# Altium PCB LC4_REV3.PcbDoc (part 2 of 2)
Units mm, origin at the board's own origin, x right, y up, seen from the top; angles counter-clockwise.
Board outline 41.25 x 70 mm, 4 copper layers (Layer 1, Layer 2, Layer 3, Layer 4), stack 1.942 mm thick; 162 components, 362 nets, 610 pads, 239 vias.
Unrouted connection lines stored in the file: 28.
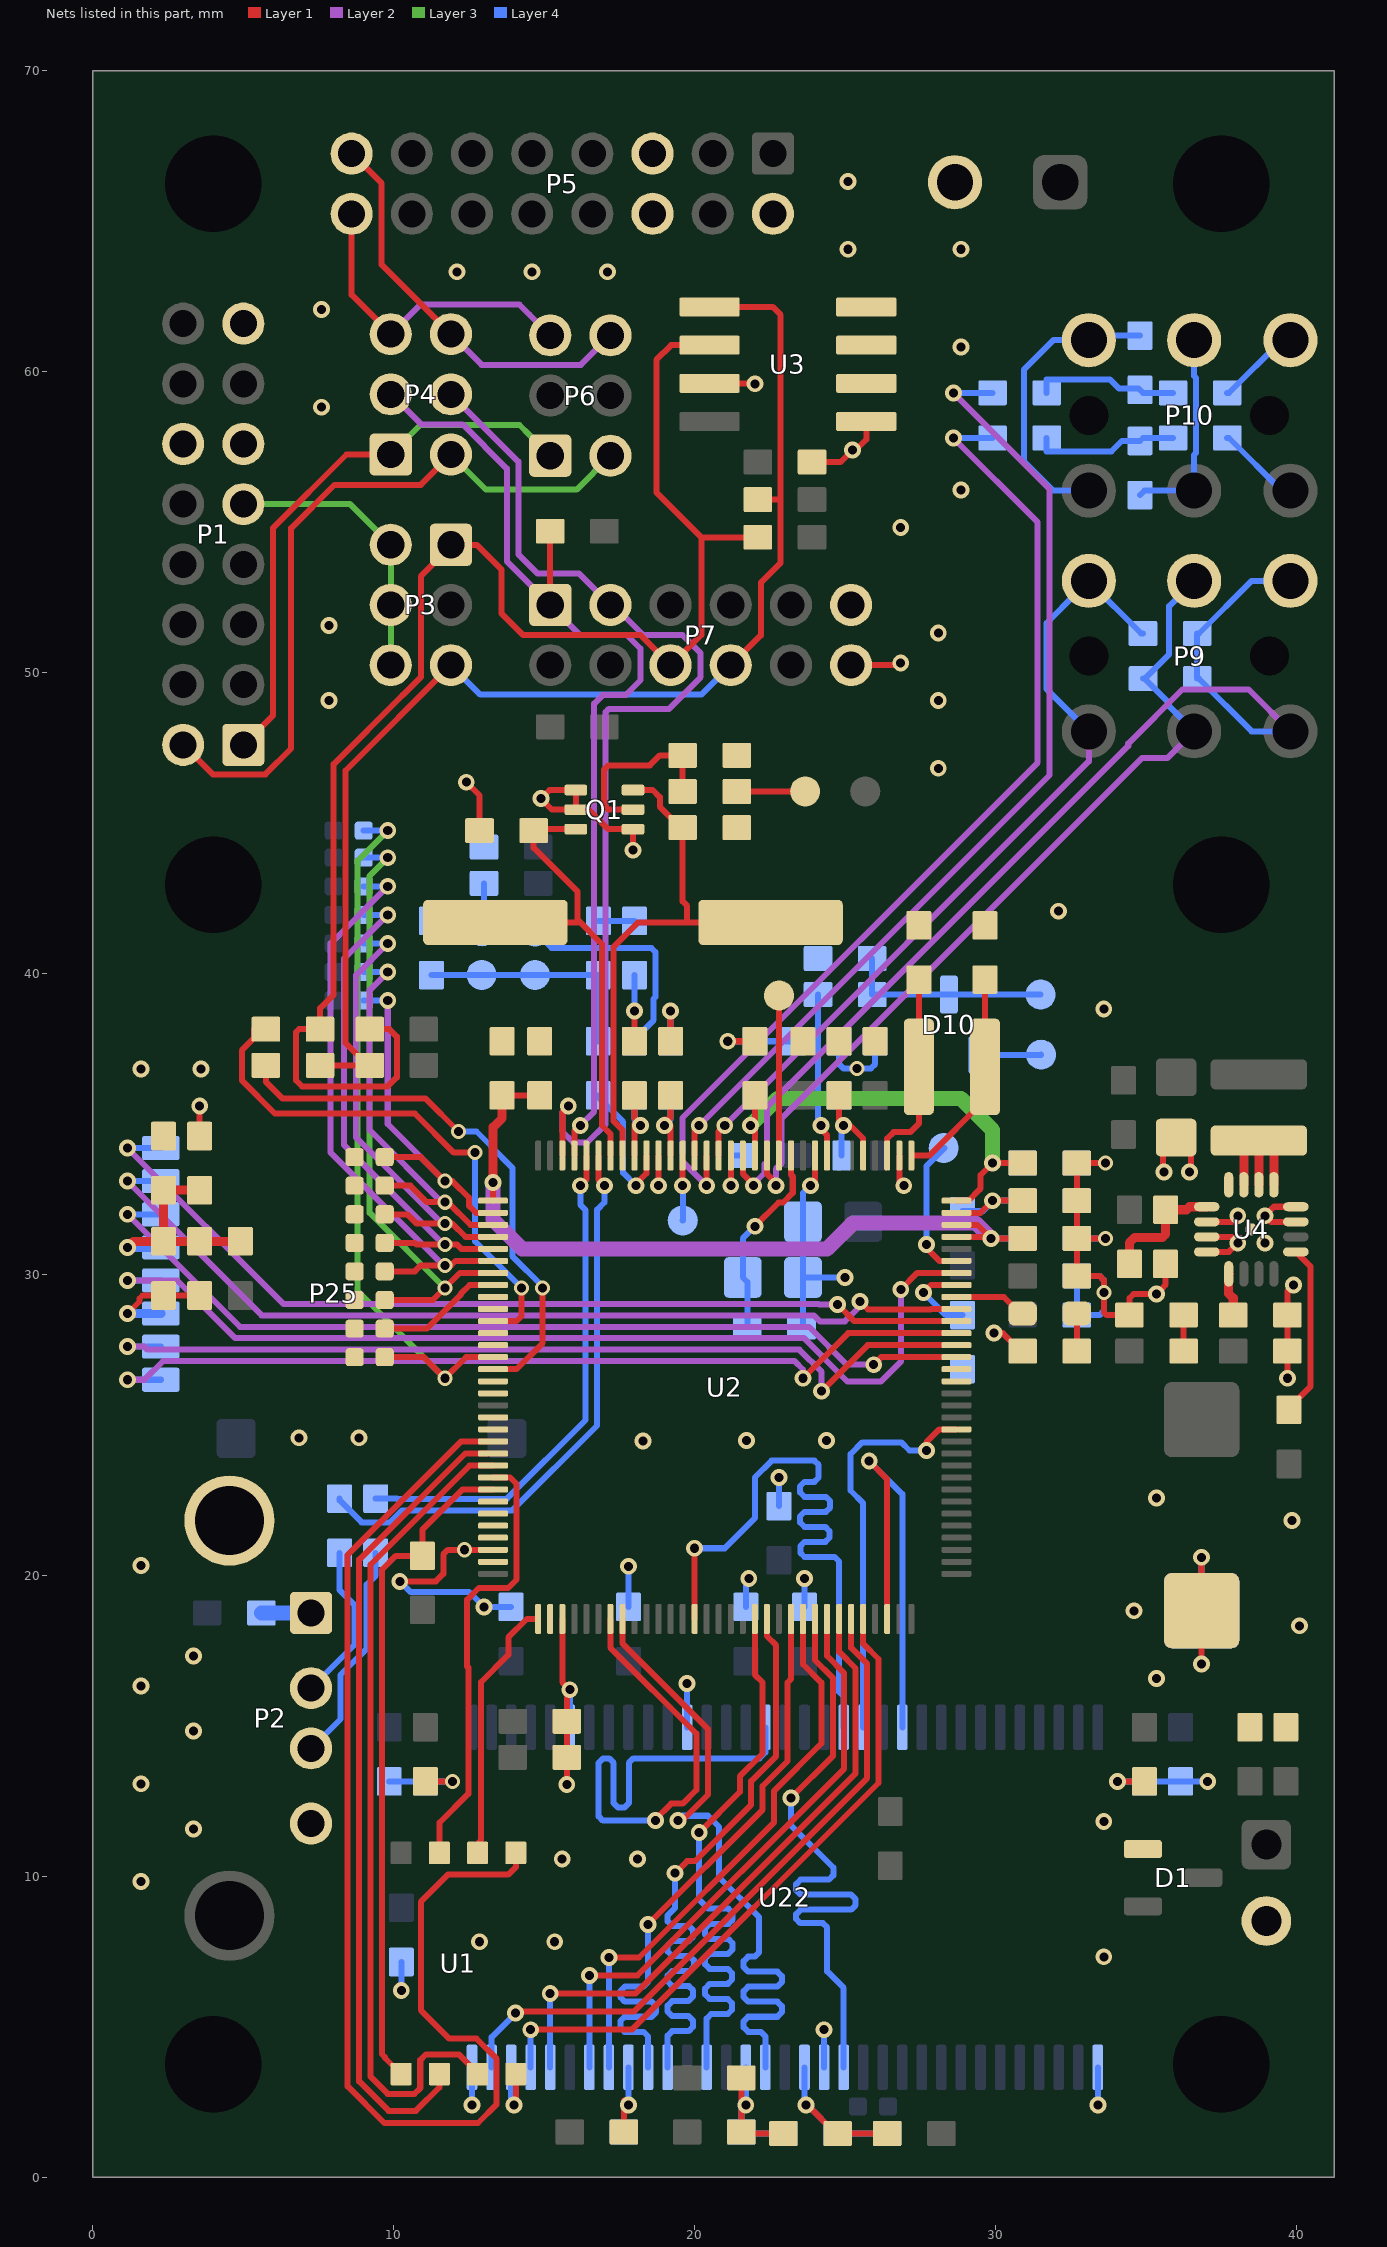
[diagram p4: the nets of this part, all layers, seen from the top]

## Via types
v1: diameter 0.56, hole 0.3, Layer 1 to Layer 4, 218 vias
v2: diameter 0.5, hole 0.3, Layer 1 to Layer 4, 21 vias

## Nets (pads, with @x,y where several pads share a name; then routed paths per layer and width w, separated by ;. In a path a pad name is that pad's centre, name@x,y a point inside that pad or via, vN(x,y) a via of type N, cw(c..) or ccw(c..) an arc to the next point about the centre after c; other vN are vias at no path point) (continued)
D_IMX[8]: U2.51 U22.54 | length 21.8
  Layer 1 w0.2: v1(20.15,11.45) 21.5,12.8 21.5,13.32 22.26,14.08 22.26,16.44 22,16.7 22,17.77 U2.51@22,18.55
  Layer 4 w0.2: v1(20.15,11.45) 20.15,9.22 20.45,8.92 21.12,8.92 21.26,8.78 21.26,8.56 21.12,8.42 20.5,8.42 20.35,8.27 20.35,8.07 20.5,7.92 21.11,7.92 21.25,7.78 21.25,7.56 21.11,7.42 20.5,7.42 20.35,7.27 20.35,7.07 20.5,6.92 21.1,6.92 21.24,6.78 21.24,6.56 21.1,6.42 20.5,6.42 20.35,6.27 20.35,6.07 20.5,5.92 21.1,5.92 21.24,5.78 21.24,5.56 21.1,5.42 20.55,5.42 20.4,5.27 20.4,4.888 U22.54@20.4,3.65
D_IMX[9]: U2.52 U22.56 | length 22.1
  Layer 1 w0.2: v1(19.35,10.1) 19.75,10.5 20.01,10.5 21.88,12.37 21.88,13.16 22.71,13.99 22.71,17.673 22.4,17.983 U2.52@22.4,18.55
  Layer 4 w0.2: U22.56@19.1,3.65 19.1,4.315 19.1,4.7 19.25,4.85 19.8,4.85 19.94,4.99 19.94,5.21 19.8,5.35 19.25,5.35 19.1,5.5 19.1,5.7 19.25,5.85 19.79,5.85 19.95,6.01 19.95,6.21 19.81,6.35 19.25,6.35 19.1,6.5 19.1,6.7 19.25,6.85 19.83,6.85 19.97,6.99 19.97,7.21 19.83,7.35 19.25,7.35 19.1,7.5 19.1,7.7 19.25,7.85 19.81,7.85 19.95,7.99 19.95,8.21 19.81,8.35 19.25,8.35 19.1,8.5 19.1,8.7 19.25,8.85 19.35,8.95 v1(19.35,10.1)
D_IMX[10]: U2.54 U22.57 | length 20.4
  Layer 1 w0.2: v1(18.45,8.4) 22.26,12.21 22.26,13 23.09,13.83 23.09,16.44 23.2,16.55 U2.54@23.2,18.55
  Layer 4 w0.2: U22.57@18.45,3.65 18.45,4.099 18.45,4.68 18.3,4.83 17.67,4.83 17.53,4.97 17.53,5.19 17.67,5.33 18.57,5.33 18.72,5.48 18.72,5.68 18.57,5.83 17.68,5.83 17.54,5.97 17.54,6.19 17.68,6.33 18.3,6.33 18.45,6.48 18.45,7.238 v1(18.45,8.4)
D_IMX[11]: U2.55 U22.59 | length 18.7
  Layer 1 w0.2: v1(17.15,7.3) 18.15,7.3 22.64,11.79 22.64,12.84 24.21,14.41 24.21,16.433 23.6,17.043 23.6,17.77 U2.55@23.6,18.55
  Layer 4 w0.2: U22.59@17.15,3.65 v1(17.15,7.3)
D_IMX[12]: U2.57 U22.60 | length 19.6
  Layer 1 w0.2: v1(16.5,6.7) 18.092,6.7 24.97,13.578 24.97,16.748 24.4,17.318 24.4,17.77 U2.57@24.4,18.55
  Layer 4 w0.2: U22.60@16.5,3.65 v1(16.5,6.7)
D_IMX[13]: U2.58 U22.62 | length 21
  Layer 1 w0.2: v1(15.2,6.1) 18.03,6.1 25.35,13.42 25.35,16.905 24.8,17.455 24.8,17.77 U2.58@24.8,18.55
  Layer 4 w0.2: U22.62@15.2,3.65 v1(15.2,6.1)
D_IMX[14]: U2.60 U22.63 | length 21.9
  Layer 1 w0.2: v1(14.55,4.9) 17.91,4.9 26.11,13.1 26.11,17.22 25.6,17.73 25.6,17.77 U2.60@25.6,18.55
  Layer 4 w0.2: U22.63@14.55,3.65 v1(14.55,4.9)
D_IMX[15]: U2.59 U22.65 | length 22.6
  Layer 1 w0.2: v1(14.05,5.45) 14.1,5.5 17.97,5.5 25.73,13.26 25.73,17.063 25.2,17.593 25.2,17.77 U2.59@25.2,18.55
  Layer 4 w0.2: U22.65@13.25,3.65 13.25,4.65 v1(14.05,5.45)
D_RXD: P4.3 P7.1 R15.1 U2.125 | length 34.3
  Layer 1 w0.2: P7.1@15.2,52.25 R15.1@15.2,54.7 ; U2.125@16,33.95 16,34.79 16.16,34.95 v1(16.2,34.95)
  Layer 2 w0.2: P4.3@9.9,59.25 9.91,59.25 10.91,58.25 12.29,58.25 13.76,56.78 13.76,53.7 15.2,52.26 P7.1@15.2,52.25 16.2,51.25 17.75,51.25 18.2,50.8 18.2,49.75 17.7,49.25 16.943,49.25 16.66,48.967 16.66,35.41 v1(16.2,34.95)
D_TXD: P4.4 P7.3 U2.126 | length 36.3
  Layer 1 w0.2: U2.126@15.6,33.95 15.6,35.4 v1(15.8,35.6)
  Layer 2 w0.2: P4.4@11.9,59.25 14.14,57.01 14.14,53.93 14.78,53.29 16.16,53.29 P7.3@17.2,52.25 17.3,52.25 18.3,51.25 19.6,51.25 20.2,50.65 20.2,49.85 19.15,48.8 17.15,48.8 17.04,48.69 17.04,34.99 16.44,34.39 15.96,34.39 15.6,34.75 15.6,35.4 v1(15.8,35.6)
DAC[0]: 
DAC[1]: 
DAC[2]: 
DAC[3]: 
DAC[4]: 
DAC[5]: 
DAC[6]: 
DAC[7]: 
DAC[8]: 
DAC[9]: 
DBG_RX: P4.6 P5.15 P6.6 | length 14.3
  Layer 1 w0.2: P5.15@8.6,67.25 8.61,67.25 9.6,66.26 9.6,63.56 11.31,61.85 ; 11.31,61.85 11.31,61.84 P4.6@11.9,61.25 11.9,61.26 11.31,61.85
  Layer 2 w0.2: P4.6@11.9,61.25 12.92,60.23 16.22,60.23 P6.6@17.2,61.21
DBG_TX: P4.5 P5.16 P6.5 | length 10.7
  Layer 1 w0.2: P5.16@8.6,65.25 8.6,62.56 9.9,61.26 P4.5@9.9,61.25
  Layer 2 w0.2: P4.5@9.9,61.25 10.88,62.23 14.178,62.23 14.505,61.903 14.507,61.903 P6.5@15.2,61.21
DCDC_VDDA: C16.1 C29.1 C149.1 C162.1 U2.96 U2.110 | length 17.1
  Layer 1 w0.2: U2.110@22,33.95 22,34.8 v1(21.85,34.95) 22,35.1 C16.1@22,35.95 ; U2.96@28.7,32.45 29.1,32.45 29.48,32.83 29.5,32.85 29.5,33.3 v1(29.9,33.7) C29.1@30.9,33.7
  Layer 3 w0.5: v1(21.85,34.95) 22.75,35.85 28.85,35.85 29.9,34.8 v1(29.9,33.7)
  Layer 4 w0.2: v1(21.85,34.95) 22,35.1 C162.1@22,35.95 ; v1(29.9,33.7) C149.1@30.9,33.7
DCDC_VDDD: C6.1 C10.1 C27.1 C147.1 U2.1 U2.93 U2.94 | length 28.2
  Layer 1 w0.2: U2.1@13.3,32.45 v1(13.3,33.05) ; C6.1@13.6,35.95 C10.1@14.85,35.95 ; U2.93@28.7,31.25 v1@29.8,31.25 ; U2.94@28.7,31.65 29.4,31.65 v1@29.8,31.25 ; C27.1@30.9,31.2 v1(29.85,31.2) v1@29.8,31.25
  Layer 1 w0.3: v1(13.3,33.05) 13.3,34.895 13.6,35.195 C6.1@13.6,35.95
  Layer 2 w0.5: v1(13.3,33.05) 13.3,31.818 14.268,30.85 24.4,30.85 25.26,31.71 29.34,31.71 v1(29.85,31.2)
  Layer 4 w0.2: v1(29.85,31.2) C147.1@30.9,31.2
DCDC_VDDIO: C28.1 C148.1 FB5.1 U2.95 | length 4.5
  Layer 1 w0.2: U2.95@28.7,32.05 29.48,32.05 29.5,32.05 v1(29.9,32.45) C28.1@30.9,32.45
  Layer 4 w0.2: FB5.1@28.9,32.1 29.57,32.1 29.9,32.43 v1(29.9,32.45) C148.1@30.9,32.45
DEBUG: R110.2 U2.89 | length 2.8
  Layer 1 w0.2: v1(27.6,29.4) 27.85,29.65 U2.89@28.7,29.65
  Layer 4 w0.2: v1(27.6,29.4) 28.35,28.65 R110.2@28.9,28.65
DL1: 
DL2: 
DL3: 
DL4: 
DL5: 
DL6: 
DL7: 
DL8: 
DL9: 
DL10: 
DL11: 
DL12: 
DONE: 
DQM0: U2.46 U22.20 | length 22.2
  Layer 1 w0.2: U2.46@20,18.55 v1(20,20.9)
  Layer 4 w0.2: v1(20,20.9) 21,20.9 22,21.9 22,23.25 22.56,23.81 23.98,23.81 24.12,23.67 24.12,23.25 23.98,23.11 23.65,23.11 23.5,22.96 23.5,22.76 23.65,22.61 24.36,22.61 24.5,22.47 24.5,22.25 24.36,22.11 23.65,22.11 23.5,21.96 23.5,21.76 23.65,21.61 24.34,21.61 24.48,21.47 24.48,21.25 24.34,21.11 23.65,21.11 23.51,20.97 23.51,20.75 23.65,20.61 24.65,20.61 24.8,20.46 24.8,16.13 24.95,15.98 U22.20@24.95,14.95
DQM1: U2.56 U22.47 | length 22.1
  Layer 1 w0.2: v1(23.2,12.6) 24.59,13.99 24.59,16.59 24,17.18 U2.56@24,18.55
  Layer 4 w0.2: v1(23.2,12.6) 23.2,11.7 24.61,10.29 24.61,10.03 24.47,9.89 23.52,9.89 23.37,9.74 23.37,9.54 23.52,9.39 25.2,9.39 25.35,9.24 25.35,9.04 25.2,8.89 23.52,8.89 23.37,8.74 23.37,8.58 23.51,8.44 24.26,8.44 24.4,8.3 24.4,6.84 24.95,6.29 U22.47@24.95,3.65
DQS0: U2.39 U22.16 | length 21.8
  Layer 1 w0.2: U2.39@17.2,18.55 17.2,17.6 20.06,14.74 20.06,12.868 19.602,12.41 19.218,12.41 18.7,11.892 v1(18.7,11.85)
  Layer 4 w0.2: v1(18.7,11.85) 16.95,11.85 16.81,11.99 16.81,13.77 16.96,13.92 17.16,13.92 17.31,13.77 17.31,12.43 17.45,12.29 17.67,12.29 17.81,12.43 17.81,13.77 17.96,13.92 18.806,13.92 22.15,13.92 22.35,14.12 U22.16@22.35,14.95
DQS1: U2.40 U22.51 | length 23.8
  Layer 1 w0.2: U2.40@17.6,18.55 17.6,17.74 20.45,14.89 20.45,12.85 20.446,12.846 20.446,12.717 19.579,11.85 v1(19.45,11.85)
  Layer 4 w0.2: v1(19.45,11.85) 19.61,12.01 20.44,12.01 20.81,11.64 20.81,9.97 22.14,8.64 22.14,7.47 22,7.33 21.78,7.33 21.63,7.18 21.63,6.98 21.78,6.83 22.75,6.83 22.9,6.68 22.9,6.48 22.75,6.33 21.78,6.33 21.63,6.18 21.63,5.98 21.78,5.83 22.75,5.83 22.9,5.68 22.9,5.48 22.75,5.33 21.78,5.33 21.63,5.18 21.63,4.98 21.78,4.83 22.2,4.83 22.35,4.68 U22.51@22.35,3.65
ENA: R26.1 U4.13 | length 5.7
  Layer 1 w0.2: R26.1@39.75,25.5 39.75,25.56 40.46,26.27 40.46,30.27 U4.13@39.98,30.75
FT_RX: P1.2 P4.2 P6.2 | length 24.3
  Layer 1 w0.2: P1.2@3,47.6 3.01,47.6 3.99,46.62 5.73,46.62 6.59,47.48 6.59,54.8 8.03,56.24 10.9,56.24 11.9,57.24 P4.2@11.9,57.25
  Layer 3 w0.2: P4.2@11.9,57.25 13.065,56.085 16.075,56.085 P6.2@17.2,57.21
FT_RXLED1#: P5.6
FT_RXLED2#: P1.11
FT_TX: P1.1 P4.1 P6.1 | length 18.7
  Layer 1 w0.2: P1.1@5,47.6 5.01,47.6 5.98,48.57 5.98,54.8 8.43,57.25 P4.1@9.9,57.25
  Layer 3 w0.2: P4.1@9.9,57.25 10.88,58.23 14.179,58.23 14.506,57.903 ; 14.507,57.903 P6.1@15.2,57.21
FT_TXEN: P1.9 P3.2 P3.4 P3.6 | length 9.5
  Layer 3 w0.2: P1.9@5,55.6 8.55,55.6 P3.2@9.9,54.25 P3.4@9.9,52.25 P3.6@9.9,50.25
FT_TXLED1#: P5.5
FT_TXLED2#: P1.12
GND: C1.2 C2.2 C3.2 C4.2 C5.2 C6.2 C7.2 C8.2 C9.2 C10.2 C11.2 C12.2 C13.2 C14.2 C15.2 C16.2 C17.2 C18.2 C19.2 C20.2 C21.2 C22.2 C24.2 C25.2 C26.2 C27.2 C28.2 C29.2 C30.2 C31.2 C32.2 C33.2 C34.2 C35.2 C36.2 C142.2 C143.2 C144.2 C145.2 C146.2 C147.2 C148.2 C149.2 C152.2 C153.2 C154.2 C155.2 C156.2 C157.2 C158.2 C159.2 C160.2 C161.2 C162.2 C163.2 C164.2 C165.2 C166.2 C167.2 C168.2 C169.2 C170.2 C171.2 C172.2 D1.1 D10.1 P1.15 P2.4 P2.5 P5.2 P7.11 P7.12 P8.2 P10.1 P11.2 P25.6 Q1.1 Q1.4 Q1.5 R3.2 R4.2 R5.2 R6.2 R7.2 R8.2 R9.2 R10.2 R17.2 R21.1 R23.1 R25.2 R106.1 R107.1 R110.1 R113.2 R119.2 RK1.2 TP16.1 U1.4 U2.30 U2.35 U2.98 U2.105 U2.112 U2.118 U3.1 U3.2 U3.3 U3.4 U3.7 U4.6 U4.7 U4.8 U4.15 U4.16 U4.17 U22.6 U22.12 U22.34 U22.48 U22.52 U22.58 U22.64 U22.66 | length 132.8
  Layer 1 w0.2: v1(1.15,28.7) 1.55,29.1 1.55,29.2 1.65,29.3 C1.2@2.35,29.3 C2.2@3.55,29.3 ; C4.2@3.55,34.6 v1(3.55,35.6) ; v1(10.2,19.8) 11.4,19.8 11.65,20.05 11.65,20.7 11.8,20.85 v2(12.35,20.85) U2.30@13.3,20.85 ; C5.2@11.05,13.15 v2(11.95,13.15) ; v1(12.41,46.36) 12.85,45.92 C7.2@12.85,44.75 ; v1(14,2.4) 14.06,2.46 14.06,3.425 U1.4@14.055,3.425 ; U2.35@15.6,18.55 15.6,16.45 v1(15.85,16.2) 15.85,16.043 15.75,15.943 C9.2@15.75,15.15 C8.2@15.75,13.95 v1(15.75,13.05) ; Q1.5@16.05,45.45 16.481,45.449 17.13,44.8 Q1.1@17.95,44.8 v1(17.95,44.1) ; C11.2@17.65,1.5 17.65,2.25 v1(17.8,2.4) v1@17.65,2.55 ; C12.2@18,37.75 v1(18,38.75) ; v1(18.8,32.95) U2.118@18.8,33.95 ; C13.2@19.2,37.75 v1(19.2,38.75) ; U3.7@20.496,59.615 21.985,59.615 v1(22,59.6) ; v1(21.1,37.75) C16.2@22,37.75 ; v1(21.2,32.95) U2.112@21.2,33.95 ; C15.2@21.55,3.3 21.55,2.55 v1(21.7,2.4) 21.55,2.25 C14.2@21.55,1.5 21.6,1.45 C18.2@22.95,1.45 ; v1(23.85,32.95) 24,33.1 U2.105@24,33.95 ; C20.2@23.9,57 24.85,57 v1(25.25,57.4) 25.354,57.4 25.703,57.75 U3.1@25.703,58.345 ; P7.12@25.2,50.25 26.775,50.25 v1(26.848,50.322) ; U2.98@26.8,33.95 26.8,33.1 v1(26.95,32.95) ; v1(29.95,28.05) 30.24,28.05 30.84,27.45 R21.1@30.9,27.45 ; v2(33.65,31.2) C27.2@32.7,31.2 ; v2(33.65,33.7) C29.2@32.7,33.7 C28.2@32.7,32.45 C27.2@32.7,31.2 ; v1(34.05,13.15) C30.2@34.95,13.15 ; v1(35.6,33.4) 35.56,33.44 35.56,34.55 C31.2@36,34.55 36.5,34.55 36.5,33.45 v1(36.45,33.4) ; R25.2@35.65,30.35 35.65,29.66 35.58,29.59 35.58,29.58 v1(35.35,29.35) 34.59,29.35 34.45,29.21 R23.1@34.45,28.65 33.69,28.65 33.6,28.74 v2(33.6,29.4) 33.6,29.81 33.46,29.95 C26.2@32.7,29.95 C27.2@32.7,31.2 ; v1(36.85,17.05) C32.2@36.85,18.825 v1(36.85,20.6) ; U4.8@37.02,30.75 37.75,30.75 v1(38.05,31.05) 37.85,31.25 U4.7@37.02,31.25 ; U4.6@37.02,31.75 37.85,31.75 v1(38.05,31.95) ; v1(39.7,26.55) C35.2@39.7,27.45 C36.2@39.7,28.65 39.7,29.45 v1(39.9,29.65) ; U4.15@39.98,31.75 39.15,31.75 v1(38.95,31.95) 39.25,32.25 U4.16@39.98,32.25 ; v1(14.894,45.816) 15.177,46.1 Q1.4@16.05,46.1 Q1.5@16.05,45.45 15.26,45.45 v1(14.894,45.816)
  Layer 4 w0.2: C172.2@9.85,13.15 C171.2@11.05,13.15 v2(11.95,13.15) ; v1(10.2,19.8) 10.55,19.45 12.5,19.45 v1(13,18.95) C168.2@13.9,18.95 ; v1(10.25,6.2) C170.2@10.25,7.15 ; v1(12.6,2.4) U22.66@12.6,3.65 ; U22.64@13.9,3.65 13.9,2.5 v1(14,2.4) ; U22.6@15.85,14.95 v1(15.85,16.2) ; C167.2@17.65,1.5 17.65,2.25 v1(17.8,2.4) U22.58@17.8,3.65 ; C164.2@17.8,18.95 v1(17.8,20.3) ; v1(18,38.75) C166.2@18,39.95 ; C165.2@19.2,37.75 v1(19.2,38.75) ; U22.12@19.75,14.95 v1(19.75,16.4) ; v1(21.1,37.75) C162.2@22,37.75 C161.2@23.3,37.75 ; v1(21.2,32.95) 21.2,33.95 C160.2@21.6,33.95 ; U22.52@21.7,3.65 v1(21.7,2.4) 21.55,2.25 C163.2@21.55,1.5 21.6,1.45 R113.2@22.95,1.45 ; C157.2@21.7,18.95 21.7,19.8 v1(21.8,19.9) ; C158.2@22.8,22.3 v1(22.8,23.25) ; C159.2@23.55,28.25 23.6,28.3 RK1.2@23.6,29.9 ; C153.2@23.65,18.95 v1(23.65,19.9) ; v1(23.85,32.95) 23.84,32.95 23.6,32.71 C154.2@23.6,31.75 RK1.2@23.6,29.9 ; U22.48@24.3,3.65 v1(24.3,4.9) ; C155.2@24.8,37.75 24.8,36.99 24.94,36.85 v2(25.4,36.85) 25.86,36.85 26,36.99 C152.2@26,37.75 ; v1(24.994,29.9) RK1.2@23.6,29.9 ; D10.1@29.4,37.3 31.512,37.3 TP16.1@31.516,37.304 ; v1(33.4,2.4) U22.34@33.4,3.65 ; v2(33.65,31.2) C147.2@32.7,31.2 ; v2(33.65,33.7) C149.2@32.7,33.7 C148.2@32.7,32.45 C147.2@32.7,31.2 ; v1(34.05,13.15) C144.2@34.95,13.15 C142.2@36.15,13.15 v1(37.05,13.15) ; C143.2@36.85,18.825 v1(36.85,20.6) ; R106.1@37.7,57.8 37.76,57.8 39.51,56.05 39.8,56.05 ; R107.1@37.7,59.3 37.76,59.3 39.51,61.05 P10.1@39.8,61.05 ; C146.2@32.7,29.95 C147.2@32.7,31.2 ; C146.2@32.7,29.95 33.46,29.95 33.6,29.81 v2(33.6,29.4) 33.6,28.79 33.46,28.65 C145.2@32.7,28.65 C146.2@32.7,29.95
  Layer 4 w0.3: v1(1.15,28.7) P25.6@2.26,28.7
  other v1: 33.598,7.322 12.848,7.822 15.348,7.822 1.598,9.822 15.598,10.572 18.098,10.572 3.348,11.572 33.598,11.822 1.598,13.072 3.348,14.822 1.598,16.322 35.348,16.572 3.348,17.322 40.098,18.322 34.598,18.822 1.598,20.322 39.848,21.822 35.348,22.572 18.281,24.464 21.72,24.482 24.379,24.482 6.848,24.572 8.848,24.572 38.95,31.05 1.598,36.822 3.598,36.822 33.598,38.822 32.098,42.072 28.098,46.822 7.848,49.072 28.098,49.072 28.098,51.322 7.848,51.572 26.848,54.822 28.848,56.072 7.598,58.822 28.848,60.822 7.598,62.072 12.098,63.322 14.598,63.322 17.098,63.322 25.098,64.072 28.848,64.072 25.098,66.322
GNDI: 
GPS2ADM: 
GPS2CPLD: 
GPS_MR: 
GPS_RESET: 
HOLD: U1.7 U2.24 | length 14.8
  Layer 1 w0.2: U2.24@13.3,23.25 13.87,23.25 14.08,23.04 14.08,19.86 13.8,19.58 12.83,19.58 12.44,19.19 12.44,16.97 12.48,16.93 12.48,12.74 11.52,11.78 U1.7@11.52,10.78 ; U1.7@11.52,10.78 U1.7@11.515,10.775 11.52,10.775 U1.7@11.52,10.78
HP_VGND: P9.1 R104.1 R105.1 U2.111 | length 36.9
  Layer 1 w0.2: U2.111@21.6,33.95 21.6,33.35 21.95,33 v1(21.95,32.95)
  Layer 2 w0.2: v1(21.95,32.95) 21.95,33 22.32,33.37 22.32,33.67 22.41,33.76 22.41,35.57 34.41,47.57 34.41,47.64 36.21,49.44 38.41,49.44 39.8,48.05
  Layer 4 w0.2: 39.8,48.05 38.51,48.05 36.76,49.8 R104.1@36.7,49.8 R105.1@36.7,51.3 36.76,51.3 38.51,53.05 P9.1@39.8,53.05
HPL: P9.5 R105.2 U2.113 | length 28.1
  Layer 1 w0.2: U2.113@20.8,33.95 20.8,34.75 v1(21,34.95)
  Layer 2 w0.2: v1(21,34.95) 33.1,47.05 33.1,48.05
  Layer 4 w0.2: 33.1,48.05 31.7,49.45 31.7,51.65 32.7,52.65 32.7,52.933 32.817,53.05 P9.5@33.1,53.05 33.1,53.04 34.84,51.3 R105.2@34.9,51.3
HPR: P9.2 R104.2 U2.109 | length 28.9
  Layer 1 w0.2: U2.109@22.4,33.95 22.4,33.34 22.7,33.04 v1(22.7,32.95)
  Layer 2 w0.2: v1(22.7,32.95) 22.7,33.51 22.89,33.7 22.89,35.19 34.86,47.16 35.71,47.16 36.6,48.05
  Layer 4 w0.2: R104.2@34.9,49.8 R104.2@34.96,49.8 ; 36.6,48.05 36.6,48.06 35.77,48.89 35.77,48.99 R104.2@34.96,49.8 ; P9.2@36.6,53.05 36.6,53.04 35.77,52.21 35.77,50.61 R104.2@34.96,49.8
I2C_SCL: P3.1 P7.6 R2.1 R13.1 R18.1 U3.6 | length 51.1
  Layer 1 w0.2: R13.1@9.2,38.15 9.85,38.15 10.1,37.9 10.1,36.55 9.8,36.25 6.95,36.25 6.75,36.45 6.75,38.05 6.85,38.15 R2.1@7.55,38.15 7.555,38.155 7.555,38.85 8,39.295 8,46.96 10.29,49.25 10.3,49.25 10.9,49.85 10.9,53.2 11.9,54.2 P3.1@11.9,54.25 12.758,54.25 13.576,53.432 13.576,51.972 14.3,51.247 14.507,51.247 18.203,51.247 P7.6@19.2,50.25 19.21,50.25 20.22,51.26 20.22,54.5 ; U3.6@20.496,60.885 19.216,60.885 18.73,60.398 18.73,55.99 20.22,54.5 ; R18.1@22.1,54.5 20.22,54.5
I2C_SDA: P3.5 P7.8 R1.1 R12.1 R19.1 U3.5 | length 42.4
  Layer 1 w0.2: R1.1@7.55,36.95 R12.1@9.14,36.95 ; R12.1@9.2,36.95 R12.1@9.14,36.95 ; P3.5@11.9,50.25 8.4,46.75 8.4,37.69 R12.1@9.14,36.95 ; U3.5@20.496,62.155 21.776,62.155 21.782,62.16 22.59,62.16 22.86,61.89 22.86,55.75 ; P7.8@21.2,50.25 21.21,50.25 22.2,51.24 22.2,52.99 22.86,53.65 22.86,55.75 ; R19.1@22.1,55.75 22.86,55.75
  Layer 4 w0.2: P3.5@11.9,50.25 12.88,49.27 16.457,49.27 16.794,49.27 20.22,49.27 P7.8@21.2,50.25
JTAG_TCK: 
JTAG_TDI: 
JTAG_TDO: 
JTAG_TMS: 
LATCH0: 
LATCH1: 
LATCH2: 
LATCH3: 
LATCH4: 
LATCH5: 
LATCH6: 
LATCH7: 
LATCH8: 
LATCH9: 
LATCH10: 
LATCH11: 
LATCH[0]: 
LATCH[1]: 
LATCH[2]: 
LATCH[3]: 
LATCH[4]: 
LATCH[5]: 
LATCH[6]: 
LATCH[7]: 
LATCH[8]: 
LATCH[9]: 
LATCH[10]: 
LATCH[11]: 
LC_CS: 
LC_JTAGNB: 
LC_MISO: 
LC_MOSI: 
LC_RESET: 
LC_SCK: 
LC_SYNC1: 
LC_SYNC2: 
LC_TRIG1: 
LC_TRIG2: 
LCD_CLK: U2.17
LCD_CS: U2.10
LCD_D0: R10.1 R122.1 U2.2 | length 12.1
  Layer 1 w0.2: R10.1@9.7,33.9 10.9,33.9 v2(11.7,33.1) 11.95,33.1 12.5,32.55 12.5,32.283 12.533,32.25 12.733,32.05 U2.2@13.3,32.05
  Layer 2 w0.2: v1(9.8,39.1) 9.8,35 v2(11.7,33.1)
  Layer 4 w0.2: R122.1@9,39.1 v1(9.8,39.1)
LCD_D1: R9.1 R123.1 U2.3 | length 13.9
  Layer 1 w0.2: R9.1@9.7,32.95 10.55,32.95 11.1,32.4 v2(11.7,32.4) 11.8,32.4 12.55,31.65 U2.3@13.3,31.65
  Layer 2 w0.2: v1(9.8,40.05) 9.2,39.45 9.2,34.8 11.6,32.4 v2(11.7,32.4)
  Layer 4 w0.2: R123.1@9,40.05 v1(9.8,40.05)
LCD_D2: R8.1 R124.1 U2.4 | length 15.7
  Layer 1 w0.2: R8.1@9.7,32 10.45,32 10.75,31.7 v2(11.7,31.7) 11.933,31.7 12.383,31.25 12.52,31.25 U2.4@13.3,31.25
  Layer 2 w0.2: v1(9.8,41) 8.75,39.95 8.75,34.55 11.6,31.7 v2(11.7,31.7)
  Layer 4 w0.2: R124.1@9,41 v1(9.8,41)
LCD_D3: R7.1 R125.1 U2.5 | length 17.5
  Layer 1 w0.2: R7.1@9.7,31.05 10.7,31.05 10.75,31 v2(11.7,31) 12.095,31 12.245,30.85 12.52,30.85 U2.5@13.3,30.85
  Layer 2 w0.2: v1(9.8,41.95) 8.35,40.5 8.35,34.3 11.65,31 v2(11.7,31)
  Layer 4 w0.2: R125.1@9,41.95 v1(9.8,41.95)
LCD_D4: R6.1 R126.1 U2.6 | length 19.5
  Layer 1 w0.2: R6.1@9.7,30.1 10.7,30.1 10.9,30.3 v2(11.7,30.3) 11.9,30.3 12.05,30.45 U2.6@13.3,30.45
  Layer 2 w0.2: v1(9.8,42.9) 7.9,41 7.9,34.05 11.65,30.3 v2(11.7,30.3)
  Layer 4 w0.2: R126.1@9,42.9 v1(9.8,42.9)
LCD_D5: R5.1 R127.1 U2.7 | length 20.4
  Layer 1 w0.2: R5.1@9.7,29.15 11.3,29.15 v2(11.7,29.55) 12.2,30.05 12.52,30.05 U2.7@13.3,30.05
  Layer 3 w0.2: v1(9.8,43.85) 9.2,43.25 9.2,32.05 v2(11.7,29.55)
  Layer 4 w0.2: R127.1@9,43.85 v1(9.8,43.85)
LCD_D6: R4.1 U2.8 | length 4.2
  Layer 1 w0.2: R4.1@9.7,28.2 11.1,28.2 12.23,29.33 12.23,29.36 12.52,29.65 U2.8@13.3,29.65
LCD_D7: U2.9
LCD_D14: U2.29
LCD_D15: U2.28
LCD_D16: U2.19
LCD_D17: U2.20
LCD_DISP: U2.12
LCD_RS: R3.1 R128.1 U2.14 | length 24.8
  Layer 1 w0.2: R3.1@9.7,27.25 11,27.25 v2(11.7,26.55) 12.4,27.25 12.52,27.25 U2.14@13.3,27.25
  Layer 3 w0.2: v1(9.8,44.75) 8.8,43.75 8.8,29.45 v2(11.7,26.55)
  Layer 4 w0.2: R128.1@9,44.75 v1(9.8,44.75)
LCD_VS: U2.16
LCD_WR: U2.13
LED1: LD1.2 U2.88 | length 2.4
  Layer 1 w0.2: U2.88@28.7,29.25 29.48,29.25 30.275,29.25 30.825,28.7 LD1.2@30.9,28.7
LED[0]: 
LED[1]: 
LED[2]: 
LED[3]: 
LED[4]: 
LED[5]: 
LED[6]: 
LED[7]: 
LED[8]: 
LED[9]: 
LED[10]: 
LED[11]: 
LINE1_INL: C151.1 U2.115 | length 32.9
  Layer 1 w0.2: U2.115@20,33.95 20,34.8 v1(20.15,34.95)
  Layer 2 w0.2: v1(20.15,34.95) 31.8,46.6 31.8,56.1 v1(28.6,59.3)
  Layer 4 w0.2: v1(28.6,59.3) C151.1@29.9,59.3
LINE1_INR: C150.1 U2.114 | length 33.5
  Layer 1 w0.2: v1(20.4,32.95) U2.114@20.4,33.95
  Layer 2 w0.2: v1(20.4,32.95) 19.59,33.76 19.59,35.2 31.4,47.01 31.4,55 v1(28.6,57.8)
  Layer 4 w0.2: v1(28.6,57.8) C150.1@29.9,57.8
LRADC1: C159.1 RK1.1 U2.107 | length 6.6
  Layer 1 w0.2: v1(22,31.6) 22.79,32.39 22.94,32.39 23.26,32.71 23.26,33.26 23.2,33.32 U2.107@23.2,33.95
  Layer 4 w0.2: C159.1@21.75,28.25 21.75,29.75 RK1.1@21.6,29.9 21.6,31.2 v1(22,31.6)
LT_GPLLT: 
LT_INIT: 
MISO: 
MOSI: 
MSP_HV_0: 
MSP_HV_1: 
MSP_HV_2: 
NC1: 
NC2: 
NC3: 
NC4: 
OE: 
OE_: 
ON/OFF: 
PG: 
PG_37: U4.4
PIN30: U2.81
PIN31: U2.82
PROGRAMN: 
PSWITCH: R116.2 U2.119 | length 4.7
  Layer 1 w0.2: v1(18.05,32.95) 18.05,33.01 18.4,33.36 U2.119@18.4,33.95
  Layer 4 w0.2: R116.2@16.8,35.95 16.8,35.89 17.62,35.07 17.62,33.38 v1(18.05,32.95)
PWM2: TP18.1 U2.91 | length 4.8
  Layer 1 w0.2: v1(27.7,31) 27.7,30.883 28.133,30.45 U2.91@28.7,30.45
  Layer 4 w0.2: v1(27.7,31) 27.7,33.6 28.3,34.2 28.298,34.202 TP18.1@28.277,34.202
PWR_GOOD: 
RAS#: U2.62 U22.23 | length 14.8
  Layer 1 w0.2: v1(25.8,23.8) 26.4,23.2 26.4,19.33 U2.62@26.4,18.55
  Layer 4 w0.2: v1(25.8,23.8) 26.9,22.7 U22.23@26.9,14.95
SBWTCK: 
SBWTDIO: 
SCK: 
SCOM: 
SD_VCC: C1.1 C2.1 C3.1 C4.1 FB1.1 P25.4 | length 7.8
  Layer 1 w0.3: v1(1.15,30.9) 1.35,31.1 C1.1@2.35,31.1 ; C4.1@3.55,32.8 C3.1@2.35,32.8 C1.1@2.35,31.1 ; FB1.1@4.9,31.1 C2.1@3.55,31.1 C1.1@2.35,31.1
  Layer 4 w0.3: v1(1.15,30.9) P25.4@2.26,30.9
SIN1: 
SIN1D: 
SIN2: 
SIN2D: 
SOUT1: 
SOUT1D: 
SOUT2: 
SOUT2D: 
SPI_CS: 
SPI_CS0: R11.1 U1.1 U2.25 | length 22.3
  Layer 1 w0.2: U1.1@10.245,3.425 9.71,3.96 9.71,3.99 9.61,4.09 9.61,20.19 10.07,20.65 R11.1@10.95,20.65 10.95,21.52 12.28,22.85 12.52,22.85 U2.25@13.3,22.85
SPI_CS1: U2.27
SPI_CS2: U2.26
SPI_MISO: U1.2 U2.22 | length 27.1
  Layer 1 w0.2: U1.2@11.515,3.425 11.52,3.425 11.52,2.984 ; 11.52,2.975 11.52,2.984 ; U2.22@13.3,24.05 12.52,24.05 12.38,24.05 8.85,20.52 8.85,3.18 9.83,2.2 10.736,2.2 11.52,2.984
SPI_MOSI: U1.5 U2.21 | length 42.2
  Layer 1 w0.2: U2.21@13.3,24.45 12.52,24.45 12.24,24.45 8.47,20.68 8.47,3.02 9.69,1.8 12.8,1.8 13.42,2.42 13.42,3.93 12.75,4.6 11.85,4.6 10.9,5.55 10.9,9.15 11.8,10.05 13.8,10.05 14.055,10.305 U1.5@14.055,10.775
SPI_SCK: U1.6 U2.33 | length 8.9
  Layer 1 w0.2: U2.33@14.8,18.55 14.42,18.55 13.81,17.94 13.81,17.36 12.9,16.45 12.9,11.2 12.75,11.05 12.75,10.775 U1.6@12.785,10.775 ; U1.6@12.785,10.775 12.79,10.775 12.79,10.78 U1.6@12.785,10.775
SQW_OUT: 
SRX: 
SS_ENA: 
SSCL: U2.34
SSDA: U2.31
SSP1_CMD: P25.3 U2.83 | length 30.8
  Layer 1 w0.2: v1(25.95,27) 26.2,27.25 27.92,27.25 U2.83@28.7,27.25
  Layer 2 w0.2: v1(1.15,32) 4.89,28.26 23.8,28.26 25.06,27 v1(25.95,27)
  Layer 4 w0.2: v1(1.15,32) P25.3@2.26,32
SSP1_DATA0: P25.7 U2.84 | length 30.3
  Layer 1 w0.2: v1(24.22,26.12) 25.75,27.65 27.92,27.65 U2.84@28.7,27.65
  Layer 2 w0.2: v1(1.15,27.6) 1.71,27.6 1.81,27.5 23.48,27.5 24.22,26.76 v1(24.22,26.12)
  Layer 4 w0.2: v1(1.15,27.6) P25.7@2.26,27.6
SSP1_DATA1: P25.8 U2.85 | length 29.9
  Layer 1 w0.2: v1(23.6,26.55) 25.1,28.05 27.92,28.05 U2.85@28.7,28.05
  Layer 2 w0.2: v1(1.15,26.5) 1.71,26.5 2.33,27.12 23.32,27.12 23.6,26.84 v1(23.6,26.55)
  Layer 4 w0.2: v1(1.15,26.5) P25.8@2.26,26.5
SSP1_DATA2: P25.1 U2.86 | length 31
  Layer 1 w0.2: v1(24.75,29) 25.3,28.45 27.92,28.45 U2.86@28.7,28.45
  Layer 2 w0.2: v1(1.15,34.2) 6.33,29.02 24.12,29.02 24.14,29 v1(24.75,29)
  Layer 4 w0.2: v1(1.15,34.2) P25.1@2.26,34.2
SSP1_DATA3: P25.2 U2.87 | length 31.1
  Layer 1 w0.2: v1(25.5,29.1) 25.76,28.84 27.84,28.84 27.85,28.85 27.92,28.85 U2.87@28.7,28.85
  Layer 2 w0.2: v1(1.15,33.1) 5.61,28.64 23.96,28.64 24.16,28.44 24.99,28.44 25.5,28.95 v1(25.5,29.1)
  Layer 4 w0.2: v1(1.15,33.1) P25.2@2.26,33.1
SSP1_SCK: P25.5 U2.90 | length 33
  Layer 1 w0.2: v1(26.85,29.5) 27.4,30.05 27.92,30.05 U2.90@28.7,30.05
  Layer 2 w0.2: v1(1.15,29.8) 2.81,29.8 4.73,27.88 23.64,27.88 25.08,26.44 26.19,26.44 26.85,27.1 v1(26.85,29.5)
  Layer 4 w0.2: v1(1.15,29.8) P25.5@2.26,29.8
STX: 
SVCC: 
SW_OUT: 
SX1: 
SX2: 
SX3: 
SX4: 
SYNC_1PPS: 
SYNC_OUT1S: 
TCK: 
TDI: 
TDO: 
TMS: 
USBDM: R121.1 U2.123 | length 19.4
  Layer 1 w0.2: U2.123@16.8,33.95 16.8,33.15 v1(17,32.95)
  Layer 4 w0.2: R121.1@8.2,22.55 8.2,22.49 8.93,21.76 9.88,21.76 10.28,22.16 13.94,22.16 16.76,24.98 16.76,32.15 17,32.39 v1(17,32.95)
USBDP: R120.1 U2.124 | length 17
  Layer 1 w0.2: v1(16.2,32.95) 16.4,33.15 U2.124@16.4,33.95
  Layer 4 w0.2: R120.1@9.4,22.55 10.1,22.55 10.11,22.54 13.759,22.54 16.38,25.161 16.38,32.14 16.2,32.32 v1(16.2,32.95)
VAG: C13.1 C165.1 U2.117 | length 3.5
  Layer 1 w0.2: v1(19,34.95) v1@19,35.15 ; U2.117@19.2,33.95 19.2,34.95 v1@19,35.15 ; C13.1@19.2,35.95 19.2,35.195 19.155,35.15 v1@19,35.15
  Layer 4 w0.2: v1(19,34.95) 19.2,35.15 C165.1@19.2,35.95
VCORE: 
VDD4V2: C21.1 C155.1 D11.1 U2.101 | length 4.6
  Layer 1 w0.2: C21.1@24.8,35.95 24.8,35.1 v1(24.95,34.95) 25.167,34.95 25.6,34.517 U2.101@25.6,33.95
  Layer 4 w0.2: C155.1@24.8,35.95 24.8,35.1 v1(24.95,34.95) 24.88,34.88 24.88,33.95 D11.1@24.875,33.95
VDD_IN: 
VDD_XTAL: C12.1 R115.1 U2.120 | length 3.4
  Layer 1 w0.2: U2.120@18,33.95 18,35 v1@18.1,35.1 ; C12.1@18,35.95 18,35.195 18.095,35.1 v1@18.1,35.1 ; v1(18.2,34.95) 18.1,35.05 v1@18.1,35.1
  Layer 4 w0.2: R115.1@18,35.95 18,35.15 v1(18.2,34.95)
Vin: 
Vref: C18.1 C23.2 R111.2 R113.1 U22.49 | length 7.5
  Layer 1 w0.2: v1(23.7,2.4) 23.74,2.4 24.69,1.45 C18.1@24.75,1.45 C23.2@26.4,1.45
  Layer 4 w0.2: U22.49@23.65,3.65 23.65,2.45 v1(23.7,2.4) 23.74,2.4 24.69,1.45 R113.1@24.75,1.45 R111.2@26.4,1.45
WE#: U2.77 U22.21 | length 13.5
  Layer 1 w0.2: v1(27.7,24.15) 27.7,24.417 28.133,24.85 U2.77@28.7,24.85
  Layer 4 w0.2: U22.21@25.6,14.95 25.6,22.4 25.18,22.82 25.18,24.03 25.57,24.42 26.87,24.42 27.14,24.15 v1(27.7,24.15)
WP#: U1.3 U2.23 | length 27.6
  Layer 1 w0.2: U1.3@12.785,3.425 12.785,3.455 12.16,4.08 11.07,4.08 10.88,3.89 10.88,2.96 10.69,2.77 9.8,2.77 9.23,3.34 9.23,20.36 12.52,23.65 U2.23@13.3,23.65
XSIG010002: 
XSIG010005: 
XSIG010007: 
XSIG010008: 
XSIG010009: 
XSIG010011: 
XSIG010019: 
XSIG010021: 
XSIG010023: 
XSIG010025: 
XSIG010027: 
XSIG010031: 
XSIG010032: 
XSIG010035: 
XSIG010036: 
XSIG010038: 
XSIG010039: 
XSIG010041: 
XSIG010042: 
XSIG010042_36: 
XSIG010043: 
XSIG010044: 
XSIG010051: 
XSIG010052: 
XSIG010053: 
XSIG010054: 
XSIG010054_36: 
XSIG010055: 
XSIG010058: 
XSIG010065: 
XSIG010066: 
XSIG010167: C156.1 D10.3 R114.2 TP17.1 | length 6.8
  Layer 4 w0.2: C156.1@25.9,40.5 R114.2@25.9,39.3 D10.3@28.45,39.3 31.5,39.3 TP17.1@31.499,39.301
XSIG010168: R114.1 U2.104 | length 5.5
  Layer 1 w0.2: v1(24.2,34.95) 24.2,34.82 24.4,34.62 U2.104@24.4,33.95
  Layer 4 w0.2: R114.1@24.1,39.3 24.1,35.05 v1(24.2,34.95)
XSIG010217: 
XSIG010218: 
XSIG010224: P2.2 R121.2 | length 5.3
  Layer 4 w0.2: P2.2@7.25,16.25 8.7,17.7 8.7,19.01 8.2,19.51 R121.2@8.2,20.75
XSIG010225: P2.3 R120.2 | length 7.4
  Layer 4 w0.2: P2.3@7.25,14.25 7.26,14.25 8.23,15.22 8.23,16.69 9.1,17.56 9.1,19.69 9.4,19.99 R120.2@9.4,20.75
XSIG010235: FB6.1 P2.1 | length 1.6
  Layer 4 w0.5: FB6.1@5.6,18.75 P2.1@7.25,18.75
XSIG010239: 
XSIG010245: P10.2 R108.2 | length 6.9
  Layer 4 w0.2: R108.2@34.8,55.9 34.95,56.05 36.6,56.05 36.6,57.24 36.66,57.3 36.66,59.8 36.6,59.86 P10.2@36.6,61.05
XSIG010247: P10.5 R109.2 | length 9.9
  Layer 4 w0.2: 33.1,56.05 31.92,56.05 30.94,57.03 30.94,60.07 31.92,61.05 P10.5@33.1,61.05 33.25,61.2 R109.2@34.8,61.2
XSIG010250: C150.2 R106.2 R108.1 | length 4.8
  Layer 4 w0.2: C150.2@31.7,57.8 31.7,57.35 33.85,57.35 34.2,57.7 R108.1@34.8,57.7 34.9,57.8 R106.2@35.9,57.8
XSIG010251: C151.2 R107.2 R109.1 | length 4.8
  Layer 4 w0.2: C151.2@31.7,59.3 31.7,59.75 33.8,59.75 34.1,59.45 34.75,59.45 R109.1@34.8,59.4 34.9,59.3 R107.2@35.9,59.3
XSIG010257: C24.1 L1.1 U2.99 | length 6.6
  Layer 1 w0.2: U2.99@26.4,33.95 26.4,34.517 26.613,34.73 27.17,34.73 27.45,35.01 L1.1@27.45,36.9 C24.1@27.45,39.8
XSIG010280: 
XSIG010300: TP19.1 U2.116 | length 2.2
  Layer 1 w0.2: v1(19.6,32.95) U2.116@19.6,33.95
  Layer 4 w0.2: v1(19.6,32.95) 19.61,32.94 19.61,31.801 TP19.1@19.604,31.795
XSIG010301: TP1.1 U2.108 | length 5.3
  Layer 1 w0.2: U2.108@22.8,33.95 22.8,34.73 22.8,38.479 22.806,38.485 TP1.1@22.806,39.265
XSIG010322: 
XSIG010325: 
XSIG010330: 
XSIG010331: 
XSIG010332: 
XSIG010333: 
XSIG010378: C166.1 R117.2 | length 1.2
  Layer 4 w0.2: R117.2@16.8,41.75 C166.1@18,41.75
XSIG010380: R118.2 TP23.1 | length 1.6
  Layer 4 w0.2: TP23.1@12.935,41.404 12.95,41.419 12.95,42.2 13,42.25 R118.2@13,43
XSIG010387: R24.2 R25.1 U4.5 | length 4.2
  Layer 1 w0.3: R24.2@34.45,30.35 34.45,31.05 34.63,31.23 35.54,31.23 35.65,31.34 R25.1@35.65,32.15 36.35,32.15 36.45,32.25 U4.5@37.02,32.25
XSIG010407: C36.1 U4.9 | length 1.4
  Layer 1 w0.3: U4.9@37.75,30.02 37.74,30.01 37.74,29.37 37.9,29.21 C36.1@37.9,28.65
XSIG010410: L2.1 U4.1 U4.2 U4.3 | length 5.4
  Layer 1 w0.3: U4.3@38.25,32.98 38.25,34.45 L2.1@38.75,34.45 ; U4.2@38.75,32.98 L2.1@38.75,34.45 ; U4.1@39.25,32.98 39.25,34.45 L2.1@38.75,34.45
XSIG010412: R116.1 R117.1 R119.1 TP20.1 TP22.1 | length 7.8
  Layer 4 w0.2: R119.1@11.25,39.95 TP22.1@12.9,39.95 ; 13.71,39.95 13.91,39.95 ; 13.71,39.951 12.927,39.951 TP22.1@12.922,39.957 ; 13.91,39.951 TP20.1@14.694,39.951 14.695,39.95 R117.1@16.8,39.95 R116.1@16.8,37.75 ; TP22.1@12.9,39.95 12.915,39.95 TP22.1@12.922,39.957 ; TP22.1@12.9,39.95 12.907,39.957 TP22.1@12.922,39.957
XSIG010415: R115.2 TP21.1 | length 7.5
  Layer 4 w0.2: TP21.1@14.698,41.4 15.247,40.85 18.56,40.85 18.7,40.71 18.7,39.22 18.64,39.16 18.64,38.45 18,37.81 R115.2@18,37.75
XSIG010428: LD1.1 R21.2 | length 1.3
  Layer 1 w0.2: R21.2@32.7,27.45 LD1.1@32.7,28.7
XSIG010476: Q1.2 R16.1 R17.1 | length 6.2
  Layer 1 w0.2: Q1.2@17.95,45.45 17.13,45.45 16.99,45.59 16.99,46.78 17.13,46.92 18.51,46.92 18.84,47.25 R17.1@19.6,47.25 R16.1@19.6,46.05
XSIG010478: R16.2 TP2.1 | length 2.3
  Layer 1 w0.2: R16.2@21.4,46.05 22.893,46.05 22.893,46.054 TP2.1@23.673,46.054
XSIG010482: R22.1 R23.2 | length 1.2
  Layer 1 w0.2: R22.1@36.25,27.45 R23.2@36.25,28.65
XSIG010571: C25.1 L1.2 U2.97 | length 7.2
  Layer 1 w0.2: U2.97@27.2,33.95 27.58,33.95 27.8,33.95 29.65,35.8 L1.2@29.65,36.9 C25.1@29.65,39.8
XSIG010661: R2.2 U2.11 | length 18.1
  Layer 1 w0.2: R2.2@5.75,38.15 5.35,38.15 5.35,37.85 4.95,37.45 4.95,36.45 6.05,35.35 10.7,35.35 12,34.05 v2(12.7,34.05) ; U2.11@13.3,28.45 14.08,28.45 14.25,28.62 v2(14.25,29.55)
  Layer 4 w0.2: v2(12.7,34.05) 12.7,31.1 v2(14.25,29.55)
XSIG010662: R1.2 U2.15 | length 18.2
  Layer 1 w0.2: R1.2@5.75,36.95 5.75,36.4 6.3,35.85 11.05,35.85 v2(12.15,34.75) ; U2.15@13.3,26.85 14.08,26.85 14.95,27.72 v2(14.95,29.55)
  Layer 4 w0.2: v2(12.15,34.75) 12.75,34.75 13.23,34.27 13.23,34.254 13.942,33.543 13.942,30.608 14.95,29.6 v2(14.95,29.55)
XSIG010817: 
XSIG010818: 
XSIG010883: 
XSIG010886: 
XSIG010891: 
XSIG010892: 
XSIG010893: 
XSIG010894: 
XSIG010959: 
XSIG010960: 
XSIG010968: 
XTALI: C7.1 Q1.6 U2.122 X1.1 | length 16.1
  Layer 1 w0.2: X1.1@13.378,41.7 16.1,41.7 16.1,41.8 ; Q1.6@16.05,44.8 14.7,44.8 C7.1@14.65,44.75 14.65,44.18 16.1,42.73 16.1,41.8 ; U2.122@17.2,33.95 17.2,34.67 16.92,34.95 16.92,40.98 16.1,41.8
XTALO: C17.1 Q1.3 U2.121 X1.2 | length 18.2
  Layer 1 w0.2: U2.121@17.6,33.95 17.6,34.807 17.3,35.107 17.3,40.878 18.122,41.7 19.75,41.7 ; Q1.3@17.95,46.1 18.605,46.1 18.84,45.865 18.84,45.55 19.54,44.85 C17.1@19.6,44.85 19.6,42.4 19.75,42.25 19.75,41.7 ; X1.2@22.522,41.7 19.75,41.7
pads on no net: D1.2 P1.3 P1.4 P1.5 P1.6 P1.7 P1.8 P1.10 P1.13 P2. P5.4 P5.7 P5.8 P5.9 P5.10 P5.11 P5.12 P5.13 P5.14 P7.5 P7.7 P9. P10. P25.A P25.B U22.14 U22.17 U22.19 U22.25 U22.43 U22.50 U22.53

## Polygon pours and split planes (outlines as drawn)
GND on Layer 2 "Layer 2-GND 1" (solid, pour order 2): 0.5,0.5 40.75,0.5 40.75,69.5 0.5,69.5
GND on Layer 4 "Layer 4-GND 1" (solid, pour order 8): 0.5,0.5 40.75,0.5 40.75,69.5 0.5,69.5
no net on Layer 4 "Layer 4-No Net" (solid, pour order 34): 14.41,25.6 15.46,25.6 15.46,27.1 14.41,27.1
no net on Layer 4 "Layer 4-No Net 1" (solid, pour order 36): 14.41,33.35 15.46,33.35 15.46,34.85 14.41,34.85
no net on Layer 4 "Layer 4-No Net 2" (solid, pour order 38): 13.01,37.85 15.21,37.85 15.21,39 13.01,39
no net on Layer 4 "Layer 4-No Net 3" (solid, pour order 40): 1.51,23.55 3.71,23.55 3.71,24.7 1.51,24.7
no net on Layer 4 "Layer 4-No Net 4" (solid, pour order 42): 1.51,37.85 4.01,37.85 4.01,39 1.51,39
GND on Layer 1 "Layer 1-GND 1" (solid, pour order 10): 0.5,0.5 40.75,0.5 40.75,69.5 0.5,69.5
3V3_IMX on Layer 3 "Layer 3-3V3_IMX" (solid, pour order 26): 0.5,0.5 40.75,0.5 40.75,69.5 0.5,69.5
2V5_DDR on Layer 3 "Layer 3-2V5_DDR" (solid, pour order 28): 11.5,0.5 37.5,0.5 37.5,15.25 37.25,15.5 29.25,15.5 29,15.75 29,35.5 28.75,35.75 23.25,35.75 23,35.5 23,25 19,21 19,17 18.75,16.75 11.75,16.75 11.5,16.5

## Keep-outs
Keep-Out Layer:
  region: 7.5,42.95 ccw(c4,42.95) 4,46.45 ccw(c4,42.95) 0.5,42.95 ccw(c4,42.95) 4,39.45 ccw(c4,42.95)
  region: 41,42.95 ccw(c37.5,42.95) 37.5,46.45 ccw(c37.5,42.95) 34,42.95 ccw(c37.5,42.95) 37.5,39.45 ccw(c37.5,42.95)
  region: 41,66.25 ccw(c37.5,66.25) 37.5,69.75 ccw(c37.5,66.25) 34,66.25 ccw(c37.5,66.25) 37.5,62.75 ccw(c37.5,66.25)
  region: 41,3.75 ccw(c37.5,3.75) 37.5,7.25 ccw(c37.5,3.75) 34,3.75 ccw(c37.5,3.75) 37.5,0.25 ccw(c37.5,3.75)
  region: 7.5,3.75 ccw(c4,3.75) 4,7.25 ccw(c4,3.75) 0.5,3.75 ccw(c4,3.75) 4,0.25 ccw(c4,3.75)
  region: 7.5,66.25 ccw(c4,66.25) 4,69.75 ccw(c4,66.25) 0.5,66.25 ccw(c4,66.25) 4,62.75 ccw(c4,66.25)

## Other copper
Layer 1:
  pour cut-out: 9,26.8 9.4,26.8 9.4,34.4 9,34.4
  region net GND: 37.62,30.62 39.38,30.62 39.38,32.38 37.62,32.38

## Silkscreen, mask and mechanical layers (free items; w line width, h text height)
Top Assembly:
  region: 13.55,31.4 14.05,31.15 13.55,30.95
Fabrication Layer:
  lines w0.1: 93.7,-53.25 93.7,-41.25 154.2,-41.25 ; 94.2,-44.25 123,-44.25 ; 111.4,-53.25 111.4,-41.25 ; 111.4,-50.25 154.2,-50.25 ; 111.4,-47.25 154.2,-47.25 ; 117.2,-53.25 117.2,-41.25 ; 123,-53.25 123,-41.25 ; 149.2,-53.25 149.2,-47.25 ; -5.5,-53.25 154.2,-53.25 154.2,73.4 -5.5,73.4 -5.5,-53.25 ; 0,0 41.25,0 41.25,70 0,70 0,0
  text "DWG BY:" at 111.945,-42.7 h0.9
  text "DATE:" at 118.157,-42.7 h0.9
  text "FABRICATION DRAWING" at 131.195,-43.35 h1.2
  text "AB" at 113.881,-43.95 h0.9
  text "270115" at 118.251,-43.95 h0.9
  text "TIME_HUB" at 136.643,-44.85 h1.2
  text "ENGR:" at 112.657,-45.7 h0.9
  text "DATE:" at 118.157,-45.7 h0.9
  text "Unless otherwise" at 94.25,-45.95 h0.9
  text "AB" at 113.881,-46.95 h0.9
  text "270115" at 118.251,-46.95 h0.9
  text "specified, dimensions" at 94.25,-47.45 h0.9
  text "CHKR:" at 112.657,-48.7 h0.9
  text "DATE:" at 118.157,-48.7 h0.9
  text "SCALE" at 150.057,-48.7 h0.9
  text "are in millimeters" at 94.25,-48.95 h0.9
  text "270115" at 118.251,-49.95 h0.9
  text "NONE" at 150.464,-49.95 h0.9
  text "APPR:" at 112.657,-51.7 h0.9
  text "DATE:" at 118.157,-51.7 h0.9
  text "SHEET" at 150.057,-51.7 h0.9
  text "FAB NUMBER:" at 123.622,-52.2 h0.9
  text "270115" at 118.251,-52.95 h0.9
  text "1 OF 1" at 149.651,-52.95 h0.9
Drill Drawing:
  drawing of 1184 lines, arcs and shapes, not listed
  text "A" at 8.6,66.8 h0.9
  text "A" at 10.6,66.8 h0.9
  text "A" at 12.6,66.8 h0.9
  text "A" at 14.6,66.8 h0.9
  text "A" at 16.6,66.8 h0.9
  text "A" at 18.6,66.8 h0.9
  text "A" at 20.6,66.8 h0.9
  text "A" at 22.6,66.8 h0.9
  text "A" at 8.6,64.8 h0.9
  text "A" at 10.6,64.8 h0.9
  text "A" at 12.6,64.8 h0.9
  text "A" at 14.6,64.8 h0.9
  text "A" at 16.6,64.8 h0.9
  text "A" at 18.6,64.8 h0.9
  text "A" at 20.6,64.8 h0.9
  text "A" at 22.6,64.8 h0.9
  text "E" at 4,64.65 h3.2
  text "E" at 37.5,64.65 h3.2
  text "A" at 3,61.15 h0.9
  text "A" at 5,61.15 h0.9
  text "A" at 9.9,60.8 h0.9
  text "A" at 11.9,60.8 h0.9
  text "A" at 15.2,60.76 h0.9
  text "A" at 17.2,60.76 h0.9
  text "A" at 3,59.15 h0.9
  text "A" at 5,59.15 h0.9
  text "A" at 9.9,58.8 h0.9
  text "A" at 11.9,58.8 h0.9
  text "A" at 15.2,58.76 h0.9
  text "A" at 17.2,58.76 h0.9
  text "l" at 33.1,57.535 h2.03
  text "l" at 39.1,57.535 h2.03
  text "A" at 3,57.15 h0.9
  text "A" at 5,57.15 h0.9
  text "A" at 9.9,56.8 h0.9
  text "A" at 11.9,56.8 h0.9
  text "A" at 15.2,56.76 h0.9
  text "A" at 17.2,56.76 h0.9
  text "A" at 3,55.15 h0.9
  text "A" at 5,55.15 h0.9
  text "A" at 9.9,53.8 h0.9
  text "A" at 11.9,53.8 h0.9
  text "A" at 3,53.15 h0.9
  text "A" at 5,53.15 h0.9
  text "A" at 9.9,51.8 h0.9
  text "A" at 11.9,51.8 h0.9
  text "A" at 15.2,51.8 h0.9
  text "A" at 17.2,51.8 h0.9
  text "A" at 19.2,51.8 h0.9
  text "A" at 21.2,51.8 h0.9
  text "A" at 23.2,51.8 h0.9
  text "A" at 25.2,51.8 h0.9
  text "A" at 3,51.15 h0.9
  text "A" at 5,51.15 h0.9
  text "A" at 9.9,49.8 h0.9
  text "A" at 11.9,49.8 h0.9
  text "A" at 15.2,49.8 h0.9
  text "A" at 17.2,49.8 h0.9
  text "A" at 19.2,49.8 h0.9
  text "A" at 21.2,49.8 h0.9
  text "A" at 23.2,49.8 h0.9
  text "A" at 25.2,49.8 h0.9
  text "l" at 33.1,49.535 h2.03
  text "l" at 39.1,49.535 h2.03
  text "A" at 3,49.15 h0.9
  text "A" at 5,49.15 h0.9
  text "A" at 3,47.15 h0.9
  text "A" at 5,47.15 h0.9
  text "E" at 4,41.35 h3.2
  text "E" at 37.5,41.35 h3.2
  text "A" at 7.25,18.3 h0.9
  text "A" at 7.25,15.8 h0.9
  text "A" at 7.25,13.8 h0.9
  text "A" at 7.25,11.3 h0.9
  text "E" at 4,2.15 h3.2
  text "E" at 37.5,2.15 h3.2
  text "Through Holes" at 109.157,-12.5 h1
  text "Symbol" at 82.516,-16.5 h1
  text "Diameter" at 96.545,-16.5 h1
  text "Tolerance" at 115.031,-16.5 h1
  text "Plated" at 130.52,-16.5 h1
  text "Quantity" at 140.547,-16.5 h1
  text "0.3000" at 97.574,-19.5 h1
  text "+/- 0.0750" at 114.728,-19.5 h1
  text "Yes" at 131.991,-19.5 h1
  text "641" at 143.003,-19.5 h1
  text "0.8000" at 97.578,-21.5 h1
  text "+/- 0.0750" at 114.728,-21.5 h1
  text "Yes" at 131.991,-21.5 h1
  text "18" at 143.502,-21.5 h1
  text "A" at 85,-23.5 h1
  text "0.9000" at 97.574,-23.5 h1
  text "+/- 0.0750" at 114.728,-23.5 h1
  text "Yes" at 131.991,-23.5 h1
  text "104" at 143.003,-23.5 h1
  text "1.0000" at 97.59,-25.5 h1
  text "+/- 0.0750" at 114.728,-25.5 h1
  text "Yes" at 131.991,-25.5 h1
  text "2" at 144,-25.5 h1
  text "1.2000" at 97.59,-27.5 h1
  text "+/- 0.1000" at 114.745,-27.5 h1
  text "Yes" at 131.991,-27.5 h1
  text "14" at 143.5,-27.5 h1
  text "2.3000" at 97.574,-29.5 h1
  text "+/- 0.1000" at 114.745,-29.5 h1
  text "Yes" at 131.991,-29.5 h1
  text "2" at 144,-29.5 h1
  text "l" at 85,-31.5 h1
  text "1.3000" at 97.59,-31.5 h1
  text "+0.1000" at 116.103,-31.5 h1
  text "No" at 132.491,-31.5 h1
  text "4" at 144,-31.5 h1
  text "E" at 85,-33.5 h1
  text "3.2000" at 97.574,-33.5 h1
  text "+0.1000" at 116.103,-33.5 h1
  text "No" at 132.491,-33.5 h1
  text "6" at 144,-33.5 h1
  text "F" at 85,-35.5 h1
  text "3.4000" at 97.574,-35.5 h1
  text "+0.1000" at 116.103,-35.5 h1
  text "No" at 132.491,-35.5 h1
  text "5" at 144,-35.5 h1

## Text inside footprints (layer, text, board x,y; h text height)
C1: Top Assembly "100nF" at 2.745,29.078 h0.55 r90
C2: Top Assembly "10uF" at 3.945,29.327 h0.55 r90
C3: Top Assembly "100nF" at 2.675,32.788 h0.55 r90
C4: Top Assembly "10uF" at 3.875,33.037 h0.55 r90
C5: Top Assembly "100nF" at 11.345,12.928 h0.55 r90
C6: Top Assembly "100nF" at 13.925,35.938 h0.55 r90
C7: Top Assembly "30pF" at 12.897,44.355 h0.55
C8: Top Assembly "10uF" at 14.187,13.625 h0.55
C9: Top Assembly "100nF" at 13.938,14.825 h0.55
C10: Top Assembly "10uF" at 15.175,36.187 h0.55 r90
C11: Top Assembly "100nF" at 15.838,1.175 h0.55
C12: Top Assembly "100nF" at 18.325,35.938 h0.55 r90
C13: Top Assembly "10uF" at 19.525,36.187 h0.55 r90
C14: Top Assembly "100nF" at 19.738,1.175 h0.55
C15: Top Assembly "100nF" at 19.738,2.975 h0.55
C16: Top Assembly "100nF" at 22.325,35.938 h0.55 r90
C17: Top Assembly "30pF" at 19.837,44.525 h0.55
C18: Top Assembly "100nF" at 22.748,1.055 h0.55
C19: Top Assembly "100nF" at 23.925,35.938 h0.55 r90
C20: Top Assembly "100nF" at 22.088,56.675 h0.55
C21: Top Assembly "100nF" at 25.125,35.938 h0.55 r90
C22: Top Assembly "100nF" at 26.325,35.938 h0.55 r90
C23: Top Assembly "100nF" at 26.198,1.055 h0.55
C24: Top Assembly "Open" at 27.775,40.037 h0.55 r90
C25: Top Assembly "Open" at 29.975,40.037 h0.55 r90
C26: Top Assembly "100nF" at 30.888,29.625 h0.55
C27: Top Assembly "100nF" at 30.888,30.875 h0.55
C28: Top Assembly "100nF" at 30.888,32.125 h0.55
C29: Top Assembly "100nF" at 30.888,33.375 h0.55
C30: Top Assembly "100nF" at 35.345,12.928 h0.55 r90
C31: Top Assembly "22uF" at 36.44,34.46 h0.6 r90
C32: Top Assembly "220uF 6.3V" at 37.236,18.83 h0.6 r90
C33: Top Assembly "100nF" at 38.775,13.138 h0.55 r90
C34: Top Assembly "10uF" at 39.975,13.387 h0.55 r90
C35: Top Assembly "2uF2" at 38.137,27.125 h0.55
C36: Top Assembly "10nF" at 38.137,28.325 h0.55
C142: Bottom Assembly "100nF" at 35.825,12.938 h0.55 r270
C143: Bottom Assembly "220uF" at 37.921,21.131 h0.6
C144: Bottom Assembly "100nF" at 34.625,12.938 h0.55 r270
C145: Bottom Assembly "10uF" at 32.663,28.425 h0.55
C146: Bottom Assembly "10uF" at 32.663,29.725 h0.55
C147: Bottom Assembly "10uF" at 32.663,30.975 h0.55
C148: Bottom Assembly "10uF" at 32.663,32.225 h0.55
C149: Bottom Assembly "10uF" at 32.663,33.475 h0.55
C150: Bottom Assembly "1uF" at 31.413,57.475 h0.55
C151: Bottom Assembly "1uF" at 31.413,58.975 h0.55
C152: Bottom Assembly "10uF" at 25.505,36.2 h0.55 r270
C153: Bottom Assembly "100nF" at 23.305,17.151 h0.55 r270
C154: Bottom Assembly "10uF" at 25.19,31.21 h0.6
C155: Bottom Assembly "10uF" at 24.455,36.15 h0.55 r270
C156: Bottom Assembly "47pF" at 25.773,40.155 h0.55
C157: Bottom Assembly "100nF" at 21.355,17.051 h0.55 r270
C158: Bottom Assembly "100nF" at 22.505,20.451 h0.55 r270
C159: Bottom Assembly "10nF" at 23.513,28.025 h0.55
C160: Bottom Assembly "10uF" at 23.273,33.605 h0.55
C161: Bottom Assembly "10uF" at 22.805,36.2 h0.55 r270
C162: Bottom Assembly "10uF" at 21.655,36.2 h0.55 r270
C163: Bottom Assembly "100nF" at 21.612,1.125 h0.55
C164: Bottom Assembly "100nF" at 17.405,17.148 h0.55 r270
C165: Bottom Assembly "1uF" at 18.855,36.397 h0.55 r270
C166: Bottom Assembly "100nF" at 17.675,39.888 h0.55 r270
C167: Bottom Assembly "100nF" at 17.712,1.125 h0.55
C168: Bottom Assembly "100nF" at 13.555,17.101 h0.55 r270
C169: Bottom Assembly "100nF" at 14.872,43.855 h0.55
C170: Bottom Assembly "100nF" at 9.925,6.938 h0.55 r270
C171: Bottom Assembly "100nF" at 10.725,12.938 h0.55 r270
C172: Bottom Assembly "100nF" at 9.475,12.938 h0.55 r270
FB1: Top Assembly "BLM18AG22" at 5.12,29.446 h0.2 r90
FB2: Top Assembly "BLM18" at 34.45,34.808 h0.4 r90
FB5: Bottom Assembly "BLM18" at 28.7,30.458 h0.4 r270
FB6: Bottom Assembly "BLM18" at 5.451,18.426 h0.4
L1: Top Assembly "N" at 28.35,36.9 h0.4 r270
L2: Top Assembly "N" at 38.75,35.35 h0.4
P2: Top Assembly "Open" at 5.589,18.6 h0.6
P9: Top Assembly "Open" at 35.15,49.15 h0.6
P10: Top Assembly "Open" at 35.164,56.964 h0.6
Q1: Top Assembly "BC847BS" at 17.15,44.617 h0.3 r90
R1: Top Assembly "Open" at 5.734,36.614 h0.6
R2: Top Assembly "Open" at 5.73,37.81 h0.6
R3: Top Assembly "Open" at 8.649,26.926 h0.4
R4: Top Assembly "Open" at 8.649,27.876 h0.4
R5: Top Assembly "Open" at 8.649,28.826 h0.4
R6: Top Assembly "Open" at 8.649,29.776 h0.4
R7: Top Assembly "Open" at 8.649,30.726 h0.4
R8: Top Assembly "Open" at 8.649,31.676 h0.4
R9: Top Assembly "Open" at 8.649,32.626 h0.4
R10: Top Assembly "Open" at 8.649,33.576 h0.4
R11: Top Assembly "10K" at 11.29,19.082 h0.6 r90
R12: Top Assembly "Open" at 9.37,36.6 h0.6
R13: Top Assembly "Open" at 9.37,37.8 h0.6
R14: Top Assembly "10K" at 15.642,47.85 h0.6
R15: Top Assembly "10K" at 15.642,54.35 h0.6
R16: Top Assembly "47K" at 20.042,45.7 h0.6
R17: Top Assembly "47K" at 20.042,46.9 h0.6
R18: Top Assembly "10K" at 22.542,54.15 h0.6
R19: Top Assembly "10K" at 22.542,55.4 h0.6
R20: Top Assembly "10K" at 26.85,10.792 h0.6 r90
R21: Top Assembly "1K" at 31.617,27.1 h0.6
R22: Top Assembly "Open" at 34.434,27.014 h0.6
R23: Top Assembly "Open" at 34.52,28.3 h0.6
R24: Top Assembly "360K" at 34.89,30.31 h0.6 r90
R25: Top Assembly "100K" at 36.09,30.31 h0.6 r90
R26: Top Assembly "1K" at 40.186,24.202 h0.6 r90
R106: Bottom Assembly "4K7" at 37.268,57.41 h0.6
R107: Bottom Assembly "4K7" at 37.268,58.91 h0.6
R108: Bottom Assembly "10K" at 34.45,56.142 h0.6 r270
R109: Bottom Assembly "10K" at 34.46,59.852 h0.6 r270
R110: Bottom Assembly "10K" at 28.51,27.302 h0.6 r270
R111: Bottom Assembly "1K" at 27.598,1.014 h0.6
R112: Bottom Assembly "Open" at 26.44,2.15 h0.4
R113: Bottom Assembly "1K" at 24.048,1.014 h0.6
R114: Bottom Assembly "0R" at 25.383,38.9 h0.6
R115: Bottom Assembly "0R" at 17.614,36.581 h0.6 r270
R116: Bottom Assembly "1K" at 16.45,36.467 h0.6 r270
R117: Bottom Assembly "1K" at 16.46,40.627 h0.6 r270
R118: Bottom Assembly "10K" at 14.368,42.56 h0.6
R119: Bottom Assembly "100K" at 10.91,40.13 h0.6 r270
R120: Bottom Assembly "0R" at 9.05,21.267 h0.6 r270
R121: Bottom Assembly "0R" at 7.8,21.267 h0.6 r270
R122: Bottom Assembly "Open" at 9.07,38.776 h0.4
R123: Bottom Assembly "Open" at 9.07,39.726 h0.4
R124: Bottom Assembly "Open" at 9.06,40.7 h0.4
R125: Bottom Assembly "Open" at 9.06,41.65 h0.4
R126: Bottom Assembly "Open" at 9.06,42.6 h0.4
R127: Bottom Assembly "Open" at 9.07,43.53 h0.4
R128: Bottom Assembly "Open" at 9.06,44.45 h0.4
RK1: Bottom Assembly "10K" at 23.158,29.6 h0.6
X1: Top Assembly "HC-49U-SMD, 24MHz" at 13.601,41.4 h0.6
?: Fabrication Layer "TIME_HUB_REV1_MASKBOT.G07" at 44.9,-42.34 h1.5; Fabrication Layer "TIME_HUB_REV1_SILKBOT.G08" at 44.9,-44.34 h1.5; Fabrication Layer "TIME_HUB_REV1_SILKTOP.G01" at 44.9,-30.4 h1.5; Fabrication Layer "LAMINATE SEQUENCE" at 23.026,-27.4 h1.5; Fabrication Layer "Cu thickness 0,035mm for All Internal Layers" at 6.035,-46.824 h1.5; Fabrication Layer "Cu thickness 0,035mm + Plating for Top and Bottom Layers" at -2.074,-49.624 h1.5; Fabrication Layer "Dielectric 0,445mm" at 0.301,-35.4 h1.5; Fabrication Layer "Dielectric 0,445mm" at 0.301,-37.4 h1.5; Fabrication Layer "Dielectric 0,445mm" at 0.301,-39.4 h1.5; Fabrication Layer "TIME_HUB_REV1_BOT.G06" at 44.9,-40.4 h1.5; Fabrication Layer "TIME_HUB_REV1_INT1.G04" at 44.9,-36.4 h1.5; Fabrication Layer "TIME_HUB_REV1_TOP.G03" at 44.9,-34.4 h1.5; Fabrication Layer "TIME_HUB_REV1_MASKTOP.G02" at 44.9,-32.4 h1.5; Fabrication Layer "TIME_HUB_REV1_INT2.G05" at 44.9,-38.4 h1.5